# Altium PCB LED SEQUENCER PCB.PcbDoc
Units mil, origin at the board's own origin, x right, y up, seen from the top; angles counter-clockwise.
Board outline 3210 x 2675 mil, 2 copper layers (Top Layer, Bottom Layer); 28 components, 27 nets, 78 pads, 9 vias.
Unrouted connection lines stored in the file: 1.
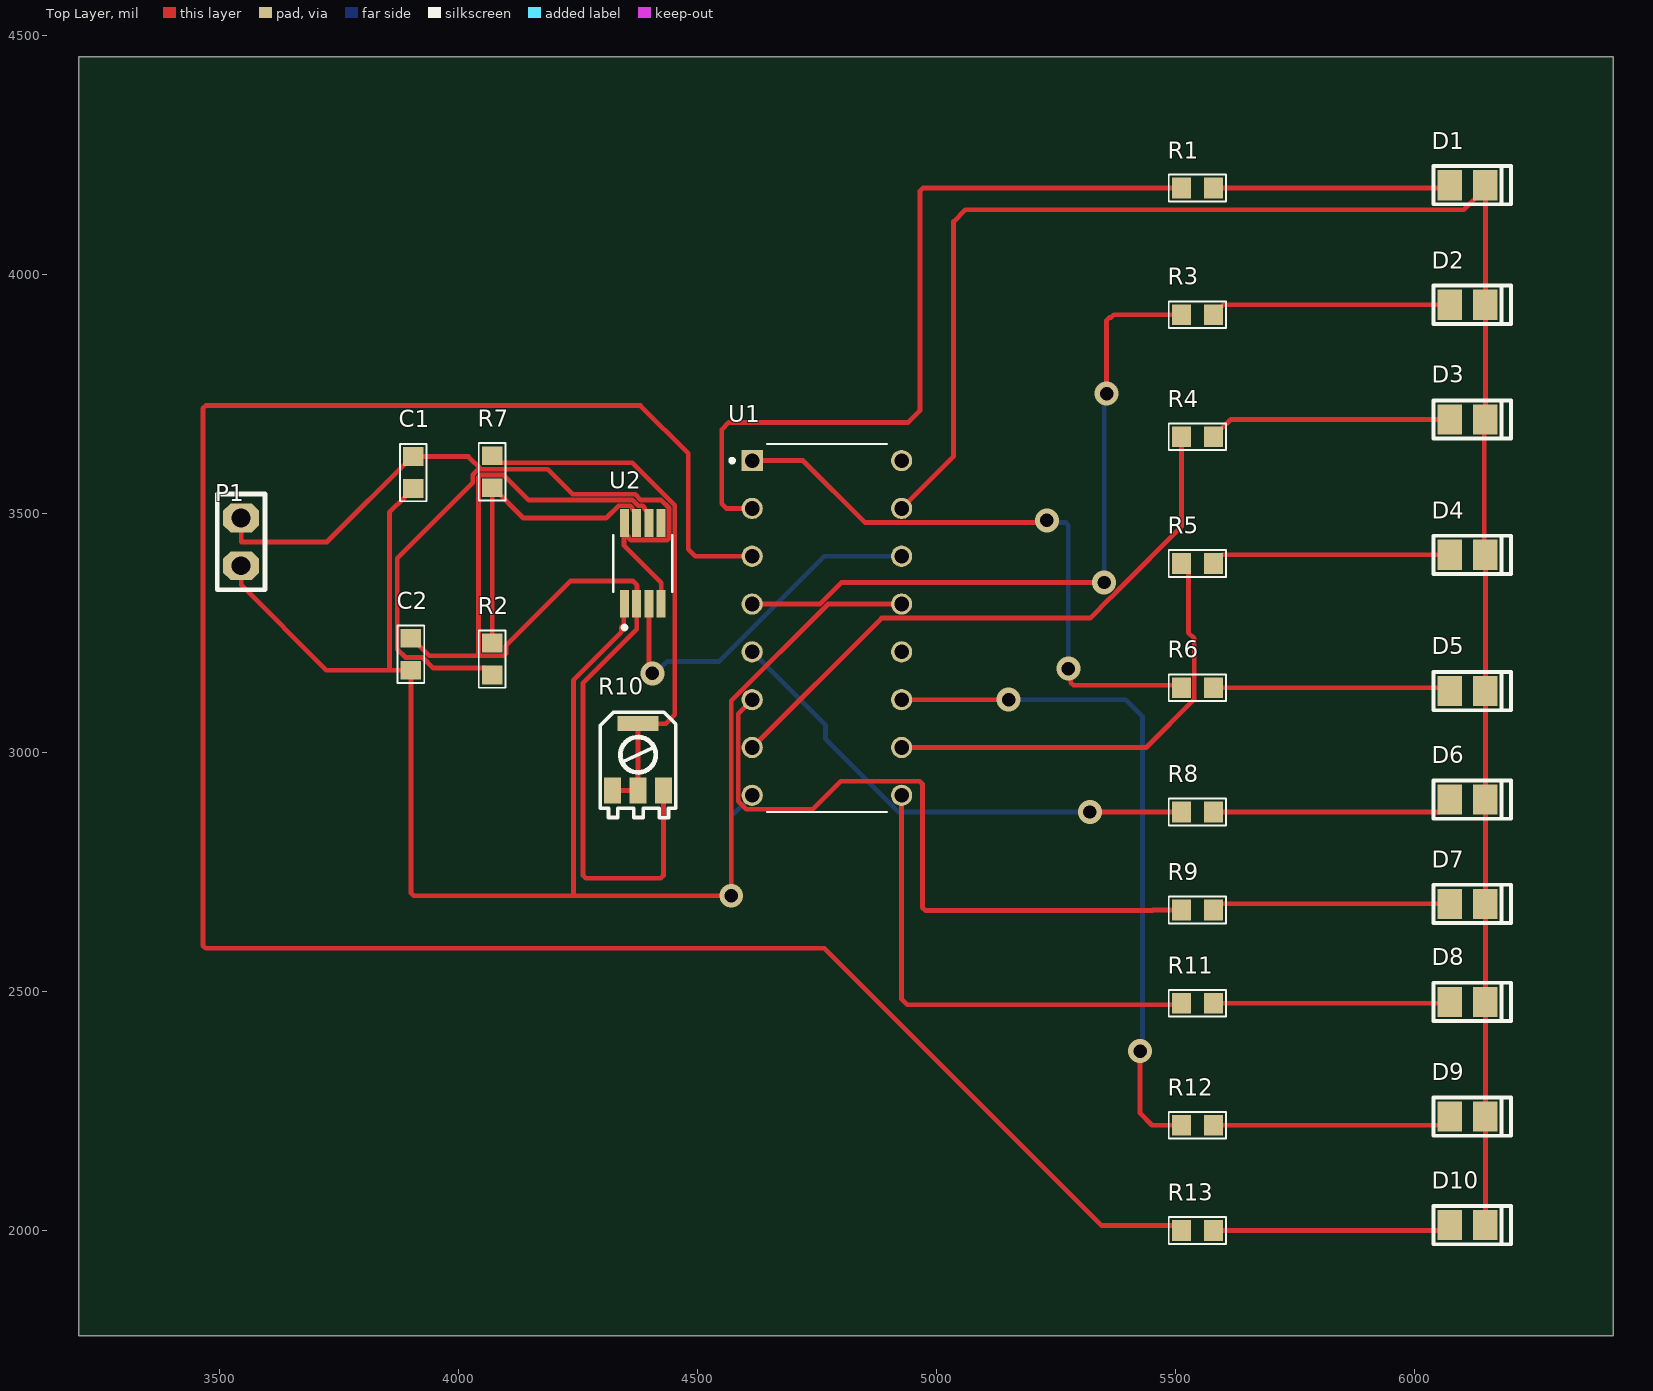
[diagram p0: Top Layer view]
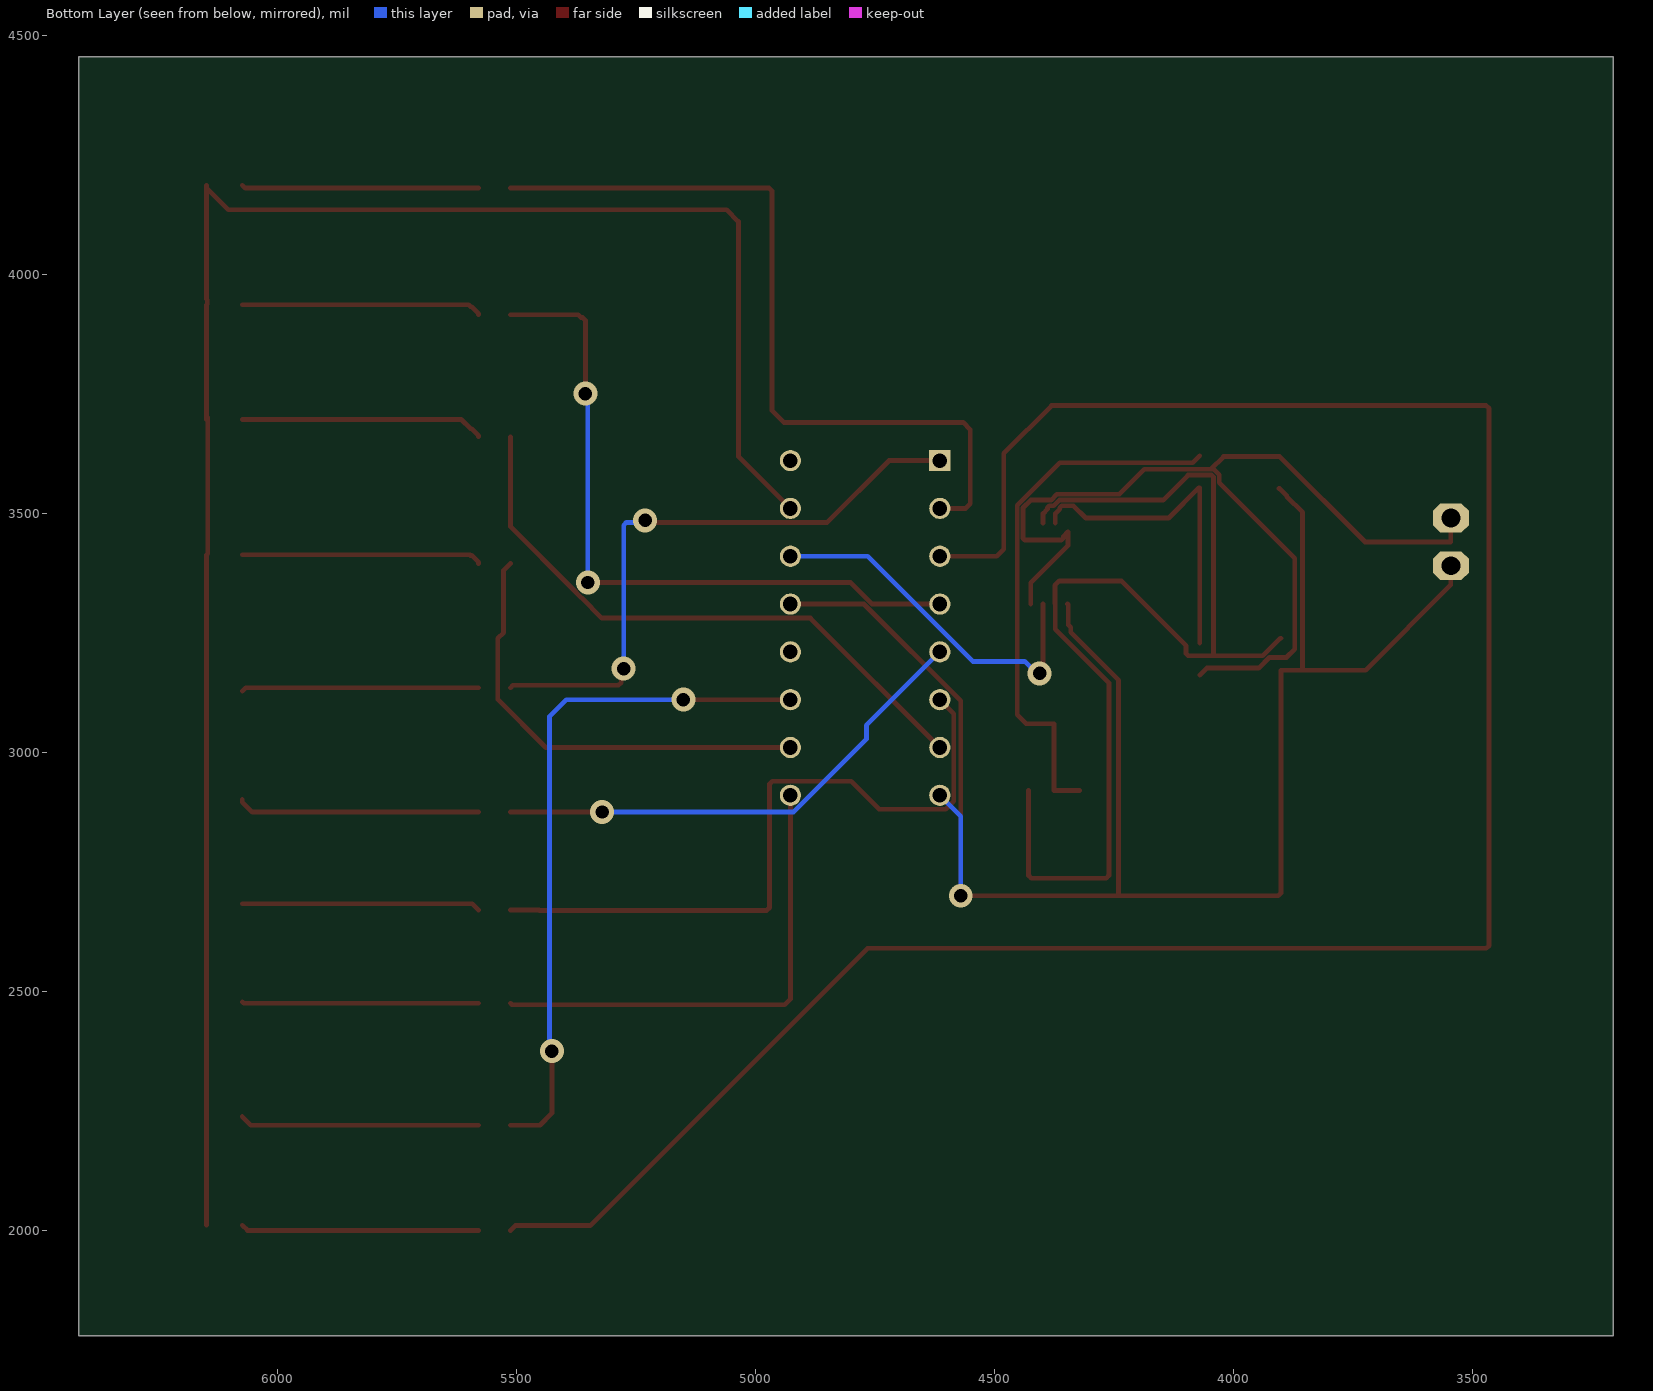
[diagram p1: Bottom Layer view, seen from below]
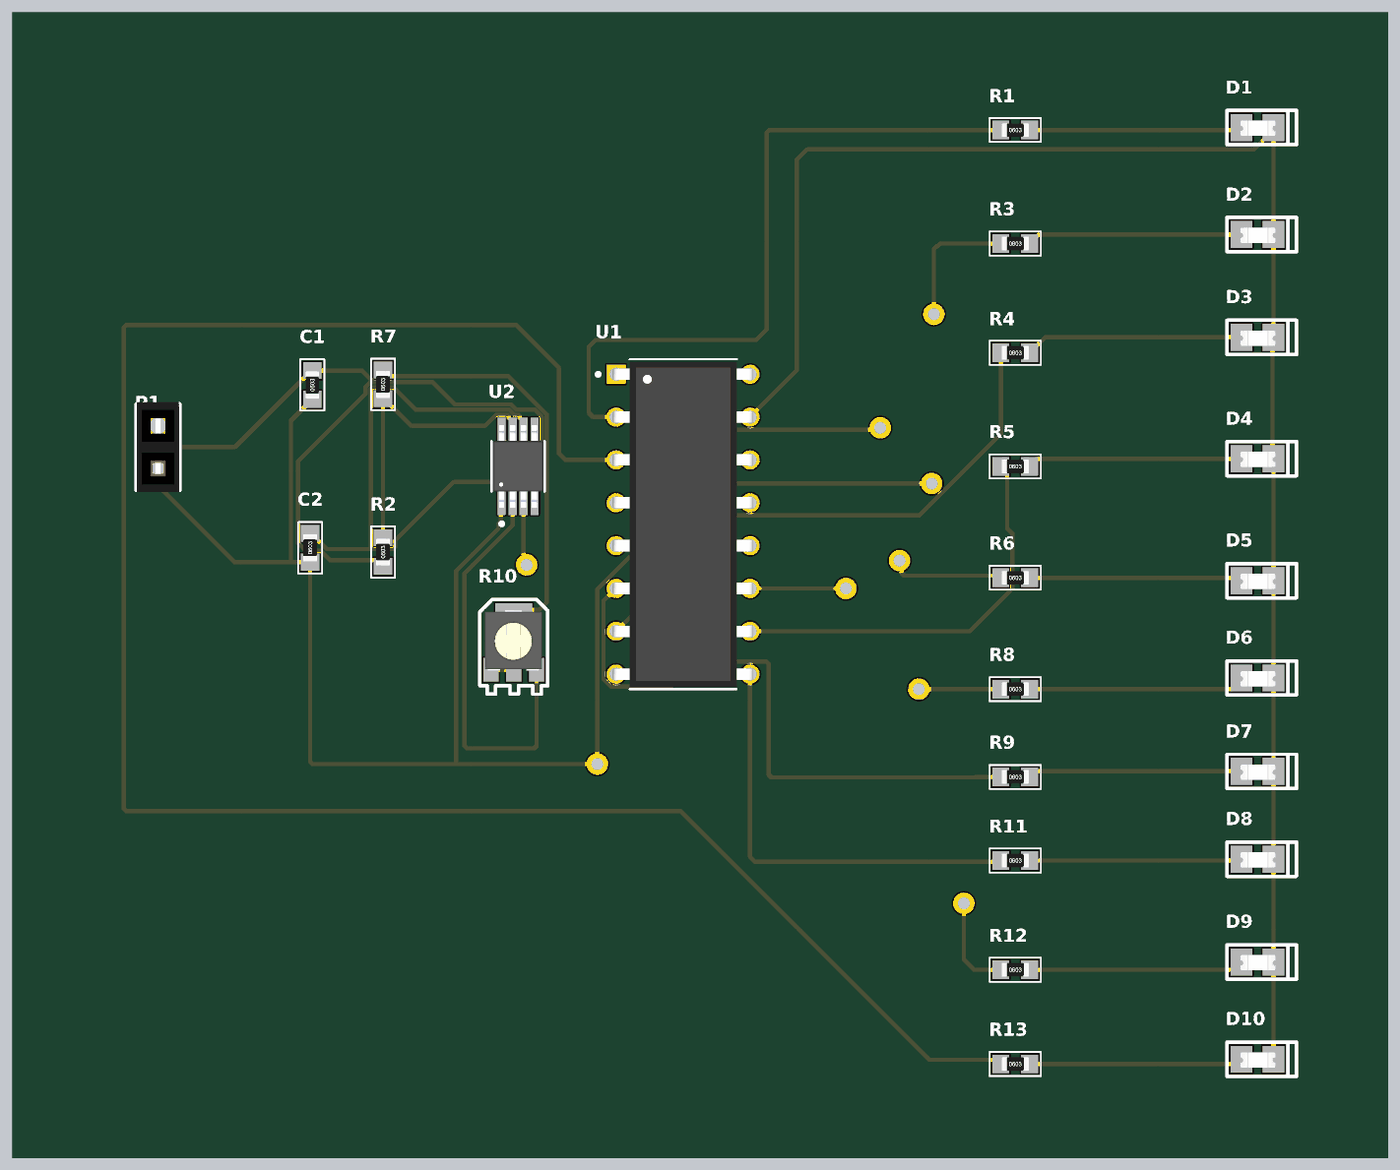
[diagram p2: 3D render of the assembled board from above, using the file's embedded part models]

## Layer stack, top to bottom
Top Solder: solder mask 0.4, Solder Resist, Dk 3.5
Top Layer: signal copper 1.4
Dielectric 1: dielectric 12.6, FR-4, Dk 4.8
Bottom Layer: signal copper 1.4
Bottom Solder: solder mask 0.4, Solder Resist, Dk 3.5

## Board outline
3205,1780 3205,4455 6415,4455 6415,1780

## Design rules (kind name [scope] priority, off if disabled: settings)
Clearance [All] p1: gap=2 ignorepadtopadclearanceinfootprint=FALSE
PolygonConnect [All] p1: connectstyle=Relief reliefconductorwidth=10 reliefentries=4 polygonreliefangle="90 Angle" airgapwidth=10
RoutingVias [All] p1: holewidth=28 width=50 viastyle="Through Hole" minholewidth=28 minwidth=50 maxholewidth=28 maxwidth=50
SolderMaskExpansion [All] p1: expansion=4 istentingtop=FALSE
SupplyNets "Schematic Supply Nets_1" [InNet('GND')] p1: voltage=0.000
SupplyNets "Schematic Supply Nets" [InNet('VCC')] p2: voltage=0.000
Width [All] p1: maxlimit=10 minlimit=10 preferedwidth=10
30 further rules are at their usual default settings.

## Classes and differential pairs
net class U2_Nets: GND NetC1_2 NetC2_2 NetR2_2 NetU1_14 NetU2_5
net class U1_Nets: GND NetR1_1 NetR3_1 NetR4_1 NetR5_1 NetR6_1 NetR8_1 NetR9_1 NetR11_1 NetR12_1 NetR13_1 NetU1_12 NetU1_14 VCC
net class R13_Nets: NetD10_A NetR13_1
net class R12_Nets: NetD9_A NetR12_1
net class R11_Nets: NetD8_A NetR11_1
net class R10_Nets: NetC2_2 NetR7_2
net class R9_Nets: NetD7_A NetR9_1
net class R8_Nets: NetD6_A NetR8_1
net class R7_Nets: NetR2_2 NetR7_2
net class R6_Nets: NetD5_A NetR6_1
net class R5_Nets: NetD4_A NetR5_1
net class R4_Nets: NetD3_A NetR4_1
net class R3_Nets: NetD2_A NetR3_1
net class R2_Nets: NetC1_2 NetR2_2
net class R1_Nets: NetD1_A NetR1_1
net class P1_Nets: GND NetC1_2
net class D10_Nets: GND NetD10_A
net class D9_Nets: GND NetD9_A
net class D8_Nets: GND NetD8_A
net class D7_Nets: GND NetD7_A
net class D6_Nets: GND NetD6_A
net class D5_Nets: GND NetD5_A
net class D4_Nets: GND NetD4_A
net class D3_Nets: GND NetD3_A
net class D2_Nets: GND NetD2_A
net class D1_Nets: GND NetD1_A
net class C2_Nets: GND NetC2_2
net class C1_Nets: GND NetC1_2

## Components (designator, comment, footprint, x,y, rotation, side; value= is the part's Value field where it differs from the comment)
C1 "100nF" MY_0603 3905,3585 r90 top
C2 "100nF" MY_0603 3900,3205 r90 top
D1 "" MY_LED_0805 6110,4183 r180 top
D2 "" MY_LED_0805 6110,3933 r180 top
D3 "" MY_LED_0805 6110,3693 r180 top
D4 "" MY_LED_0805 6110,3410 r180 top
D5 "" MY_LED_0805 6110,3125 r180 top
D6 "" MY_LED_0805 6110,2898 r180 top
D7 "" MY_LED_0805 6110,2680 r180 top
D8 "" MY_LED_0805 6110,2475 r180 top
D9 "" MY_LED_0805 6110,2235 r180 top
D10 "" MY_LED_0805 6110,2008 r180 top
P1 "Header 2" MY_FE02 3545,3440 r90 top
R1 "1K" MY_0603 5545,4180 r0 top
R2 "1K" MY_0603 4070,3195 r90 top
R3 "1K" MY_0603 5545,3915 r0 top
R4 "1K" MY_0603 5545,3660 r0 top
R5 "1K" MY_0603 5545,3395 r0 top
R6 "1K" MY_0603 5545,3135 r0 top
R7 "1K" MY_0603 4070,3586.54 r90 top
R8 "1K" MY_0603 5545,2875 r0 top
R9 "1K" MY_0603 5545,2670 r0 top
R10 "1K" My_Pot 4375,2994.8 r0 top
R11 "1K" MY_0603 5545,2475 r0 top
R12 "1K" MY_0603 5545,2220 r0 top
R13 "1K" MY_0603 5545,2000 r0 top
U1 "CD4017BEE4" DIP794W45P254L1969H508Q16 4770,3260 r0 top
U2 "LM555CMM/NOPB" SOP65P490X110-8N 4385,3395 r90 top

## Footprints (in the part's own frame and the unit in brackets; to place one, negate y for a bottom-side part, rotate by r counter-clockwise, add the part's x,y. Pads: shape width x height; smd on the part's side, far side on the other; paste and mask are expansions set on the pad)
DIP794W45P254L1969H508Q16 [mm]
  rect 1.13x1.13 / inner round 1.13 / far side rect 1.13x1.13 hole 0.78: 1(-3.97,8.89)
  round 1.13 hole 0.78: 2(-3.97,6.35) 3(-3.97,3.81) 4(-3.97,1.27) 5(-3.97,-1.27) 6(-3.97,-3.81) 7(-3.97,-6.35) 8(-3.97,-8.89) 9(3.97,-8.89) 10(3.97,-6.35) 11(3.97,-3.81) 12(3.97,-1.27) 13(3.97,1.27) 14(3.97,3.81) 15(3.97,6.35) 16(3.97,8.89)
  silkscreen extent -5.13,-9.77 3.17,9.77, body extent -4.15,-9.65 4.15,9.65, height 5.08
MY_0603 [mm]
  rect 1x1.1 smd: 1(-0.85,0) 2(0.85,0)
  silkscreen extent -1.52,-0.71 1.52,0.71, body extent -0.8,-0.4 0.8,0.4, height 0.44
MY_FE02 [mil]
  oct 60x75 hole 39.37: 1(-50,0) 2(50,0)
  silkscreen extent -100,-50 100,50, body extent -105,-49 105,49, height 335
MY_LED_0805 [mm]
  rect 1.3x1.6 smd: A(0.95,-0.076) K(-0.95,-0.076)
  silkscreen extent -2.31,-1.09 1.8,0.94, body extent -1.06,-0.48 1.01,0.42, height 0.86
My_Pot [mm]
  rect 0.9x1.4 smd: 1(-1.35,-1.9) 2(1.35,-1.9) 3(0,-1.9)
  rect 2.2x0.8 smd: 3(0,1.65)
  silkscreen extent -2.01,-3.34 2.01,2.26, body extent -1.73,-1.95 1.67,1.65, height 2.02
SOP65P490X110-8N [mm]
  rect 1.47x0.48 smd: 1(-2.15,0.975) 2(-2.15,0.325) 3(-2.15,-0.325) 4(-2.15,-0.975) 5(2.15,-0.975) 6(2.15,-0.325) 7(2.15,0.325) 8(2.15,0.975)
  silkscreen extent -3.5,-1.57 1.5,1.57, body extent -2.45,-1.5 2.45,1.5, height 1.1

## Part data
C1 C2: library part "Cap ceramic", "None polar capacitor", ASiD Part Number=C-AS, Volte=50v
D1 D2 D3 D4 D5 D6 D7 D8 D9 D10: library part LED, "Typical INFRARED GaAs LED", ASiD Part Number=LED-AS
P1: "Header, 2-Pin", ASiD Part Number="Header 2-AS"
R1 R2 R3 R4 R5 R6 R7 R8 R9 R11 R12 R13: library part Res, "Standard resistor", ASiD Part Number=Res-AS
R10: library part "Variable Resistor", "Potentiometer", ASiD Part Number="Variable Resistor-AS"
U1: "CMOS Decade Counter with 10 Decoded Outputs 16-PDIP -55 to 125", Package="PDIP-16 Texas Instruments", Check_prices=https://www.snapeda.com/parts/CD4017BEE4/Texas+Instruments/view-part/?ref=eda, MF="Texas Instruments", MP=CD4017BEE4, SnapEDA_Link=https://www.snapeda.com/parts/CD4017BEE4/Texas+Instruments/view-part/?ref=snap
U2: "Highly Stable 555 Timer", Package="VSSOP-8 Texas Instruments", Check_prices=https://www.snapeda.com/parts/LM555CMM/NOPB/Texas+Instruments/view-part/?ref=eda, MF="Texas Instruments", MP=LM555CMM/NOPB, SnapEDA_Link=https://www.snapeda.com/parts/LM555CMM/NOPB/Texas+Instruments/view-part/?ref=snap

## Via types
v1: diameter 50, hole 28, Top Layer to Bottom Layer, 9 vias

## Nets (pads, with @x,y where several pads share a name; then routed paths per layer and width w, separated by ;. In a path a pad name is that pad's centre, name@x,y a point inside that pad or via, vN(x,y) a via of type N, cw(c..) or ccw(c..) an arc to the next point about the centre after c; other vN are vias at no path point)
GND: C1.1 C2.1 D1.K D2.K D3.K D4.K D5.K D6.K D7.K D8.K D9.K D10.K P1.1 U1.8 U1.13 U1.15 U2.1 | length 7710.4
  Top Layer w10: P1.1 3545,3350 3723.46,3171.54 3855,3171.54 ; C1.1 3903.03,3551.54 3888.35,3536.85 3888.35,3534.88 3855,3501.54 3855,3171.54 ; U2.1 4345.24,3308.98 4345.24,3266.42 4340,3261.18 4340,3250.86 4240,3150.86 4240,2700 ; U1.13 4772.34,3310 4570,3107.66 v1(4570,2700) 4240,2700 ; U1.15 5035,3618.7 5035,4110 5059.75,4134.75 6102.06,4134.75 D1.K@6147.4,4180.09 ; D10.K D9.K D8.K D7.K D6.K D5.K D4.K 6145,3415.4 6145,3700 D3.K@6147.4,3697.6 ; D3.K D3.K@6147.4,3697.6 ; D1.K D1.K@6147.4,4180.09 ; 3855,3171.54 C2.1 3900,2705.86 3905.86,2700 4240,2700 ; D3.K@6147.4,3697.6 D2.K 6145.84,3937.56 6145.84,3945.84 6147.4,3947.4 D1.K@6147.4,4180.09
  Bottom Layer w10: v1(4570,2700) 4570,2866.3 U1.8
NetC1_2: C1.2 P1.2 R2.1 U2.4 U2.8 | length 2087.7
  Top Layer w10: P1.2 3545,3440 3724.57,3440 3903.03,3618.46 C1.2 4020.3,3618.46 4047.01,3591.76 ; R2.1 4055.31,3176.22 3946.55,3176.22 3924.55,3198.22 3889.01,3198.22 3871.35,3215.88 3871.35,3405.66 4029.35,3563.66 4029.35,3580.63 4040.48,3591.76 4047.01,3591.76 ; U2.4 4423.39,3354.29 4345.86,3431.82 4345.86,3460.92 4355.76,3451.02 4355.76,3447.81 4359.86,3443.71 4435.73,3443.71 4439.83,3447.81 4439.83,3511.48 4423.73,3527.58 4380.9,3527.58 4368.9,3539.58 4238.09,3539.58 4185.92,3591.76 4047.01,3591.76
NetC2_2: C2.2 R10.2 U2.2 U2.6 | length 2355
  Top Layer w10: C2.2 3901.97,3238.46 3938.65,3201.78 4041.35,3201.78 ; U2.6 4397.8,3499.13 4388.65,3508.28 4388.65,3511.48 4384.55,3515.58 4375.93,3515.58 4363.93,3527.58 4146.73,3527.58 4094.55,3579.76 4045.45,3579.76 4041.35,3575.66 4041.35,3205.88 4043.4,3203.83 4045.45,3201.78 4094.55,3201.78 4098.65,3205.88 4098.65,3222.85 4234.09,3358.29 4363.93,3358.29 4372.96,3349.26 4372.96,3311.11 U2.2 4372.2,3257.2 4260,3145 4260,2742.57 4265.86,2736.72 4422.29,2736.72 4428.15,2742.57 R10.2
NetD1_A: D1.A R1.2 | length 496.6
  Top Layer w10: R1.2 6066.6,4180 D1.A
NetD2_A: D2.A R3.2 | length 504
  Top Layer w10: R3.2 5578.46,3916.97 5593.15,3931.65 5595.12,3931.65 5599.46,3936 D2.A
NetD3_A: D3.A R4.2 | length 510.2
  Top Layer w10: R4.2 5578.46,3661.97 5593.15,3676.65 5595.12,3676.65 5614.46,3696 D3.A
NetD4_A: D4.A R5.2 | length 502.7
  Top Layer w10: R5.2 5578.46,3396.97 5593.15,3411.65 5595.12,3411.65 5596.46,3413 D4.A
NetD5_A: D5.A R6.2 | length 497
  Top Layer w10: R6.2 6065.6,3135 D5.A
NetD6_A: D6.A R8.2 | length 508.1
  Top Layer w10: R8.2 6052.01,2875 6072.6,2895.59 D6.A
NetD7_A: D7.A R9.2 | length 499.5
  Top Layer w10: R9.2 5591.46,2683 D7.A
NetD8_A: D8.A R11.2 | length 495.4
  Top Layer w10: R11.2 6069.6,2475 D8.A
NetD9_A: D9.A R12.2 | length 501.6
  Top Layer w10: R12.2 6054.6,2220 D9.A
NetD10_A: D10.A R13.2 | length 498.7
  Top Layer w10: R13.2 6061.6,2000 D10.A
NetR1_1: R1.1 U1.2 | length 1662.5
  Top Layer w10: U1.2 4560,3510 4550,3520 4550,3675 4565,3690 4940,3690 4965,3715 4965,4174.14 4970.86,4180 R1.1
NetR2_2: R2.2 R7.1 U2.7 | length 691.7
  Top Layer w10: R2.2 R7.1 4071.97,3553.07 4135.04,3490 4308.68,3490 4334.27,3515.58 4358.96,3515.58 4363.06,3511.48 4363.06,3508.28 4372.2,3499.13 U2.7
NetR3_1: R3.1 U1.4 | length 1466.7
  Top Layer w10: U1.4 4755.37,3310 4800.37,3355 v1(5350,3355) ; v1(5355,3750) 5355,3903.28 5360.86,3909.14 5364.14,3909.14 5370,3915 R3.1
  Bottom Layer w10: v1(5350,3355) 5350,3745 v1(5355,3750)
NetR4_1: R4.1 U1.7 | length 1277.6
  Top Layer w10: U1.7 4884.46,3280.76 5320.76,3280.76 5363,3323 5363.25,3323 5382,3341.75 5382,3342 5511.54,3471.54 R4.1
NetR5_1: R5.1 U1.10 | length 949.1
  Top Layer w10: U1.10 5437.77,3010 5538.22,3110.45 5538.22,3238.4 5526.22,3250.4 5526.22,3380.31 R5.1
NetR6_1: R6.1 U1.1 | length 1288
  Top Layer w10: U1.1 4720.06,3610 4849.3,3480.76 5225.76,3480.76 v1(5230,3485) ; v1(5275,3175) 5280,3170 5280,3145.86 5285.86,3140 5506.54,3140 R6.1
  Bottom Layer w10: v1(5230,3485) 5234.14,3480.86 5269.14,3480.86 5275,3475 v1(5275,3175)
NetR7_2: R7.2 R10.1 R10.3 | length 1140.3
  Top Layer w10: R7.2 4084.69,3605.31 4362.97,3605.31 4451.83,3516.45 4451.83,3078.29 4433.31,3059.76 4375,3059.76 4375,2920 R10.1
NetR8_1: R8.1 U1.5 | length 1053.4
  Top Layer w10: v1(5320,2875) R8.1
  Bottom Layer w10: U1.5 4767.24,3056.46 4767.24,3027.7 4919.94,2875 v1(5320,2875)
NetR9_1: R9.1 U1.6 | length 1446.2
  Top Layer w10: U1.6 4584.46,3080.76 4584.46,2897.89 4601.59,2880.76 4740.76,2880.76 4799.24,2939.24 4964.14,2939.24 4970,2933.39 4970,2675 4975.86,2669.14 5450.93,2669.14 5451.78,2670 R9.1
NetR11_1: R11.1 U1.9 | length 1017.6
  Top Layer w10: U1.9 4926.3,2483.7 4938,2472 5508.54,2472 R11.1
NetR12_1: R12.1 U1.11 | length 1447.2
  Top Layer w10: U1.11 v1(5150,3110) ; v1(5425,2375) 5425,2245 5450,2220 R12.1
  Bottom Layer w10: v1(5150,3110) 5395,3110 5430,3075 5430,2380 v1(5425,2375)
NetR13_1: R13.1 U1.3 | length 4815.4
  Top Layer w10: U1.3 4495,3410 4480,3425 4480,3625 4380,3725 3470.86,3725 3465,3719.14 3465,2595.86 3470.86,2590 4765,2590 5345,2010 5501.54,2010 R13.1
NetU1_14: U1.14 U2.3 | length 771.1
  Top Layer w10: U2.3 4397.8,3172.2 v1(4405,3165)
  Bottom Layer w10: v1(4405,3165) 4411.57,3165 4436.57,3190 4545,3190 4765,3410 U1.14
VCC: U1.16
pads on no net: U1.12 U2.5